# Altium PCB G2G-U Module.PcbDoc
Units mil, origin at the board's own origin, x right, y up, seen from the top; angles counter-clockwise.
Board outline 516 x 504.3 mil, 2 copper layers (Top, Bottom), stack 61.811 mil thick; 5 components, 4 nets, 14 pads, 0 vias.
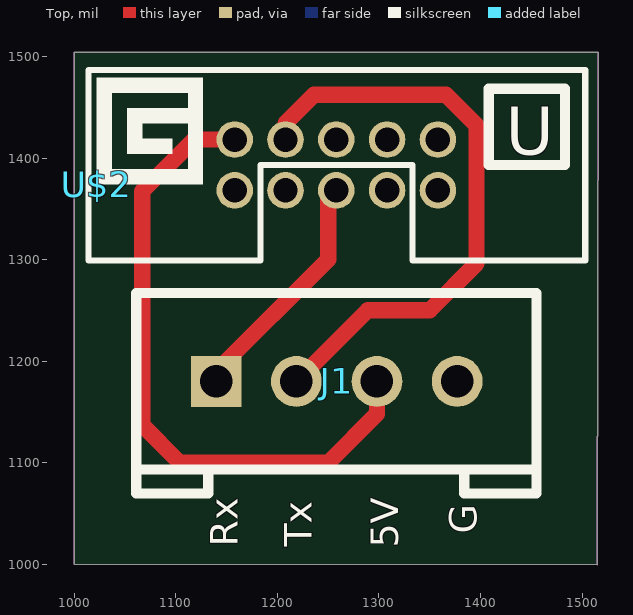
[diagram p0: Top view]
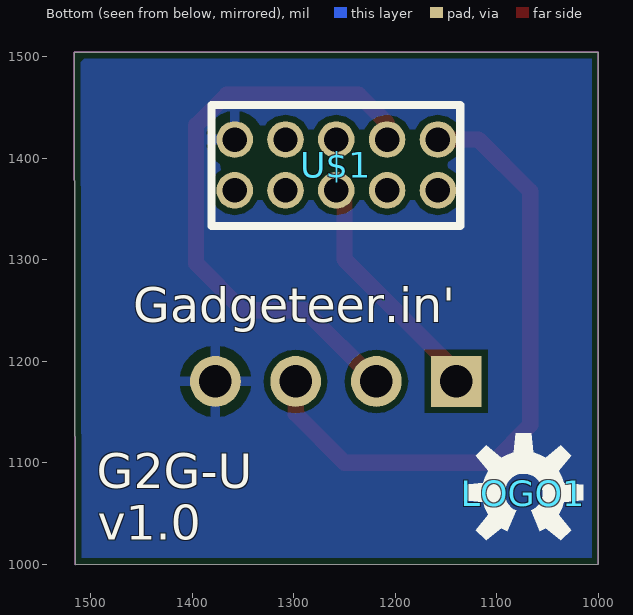
[diagram p1: Bottom view, seen from below]

## Layer stack, top to bottom
Top Solder: solder mask 0.4, Solder Resist, Dk 3.5
Top: signal copper 1.378
Dielectric 1: core 59.0551, FR-4, Dk 4.8
Bottom: signal copper 1.378
Bottom Solder: solder mask 0.4, Solder Resist, Dk 3.5

## Board outline
1000,1000.3 1515,1000 1516,1504.3 1000,1504.3

## Design rules (kind name [scope] priority, off if disabled: settings)
Clearance mdViaVia [IsVia vs IsVia] p1: gap=6
Clearance mdPadVia [IsPad vs IsVia] p2: gap=6
Clearance mdPadPad [IsPad vs IsPad] p3: gap=6
Clearance mdWireVia [(InLayerClass('Signal Layers') AND IsTrack) vs IsVia] p4: gap=6
Clearance mdWirePad [(InLayerClass('Signal Layers') AND IsTrack) vs IsPad] p5: gap=6
Clearance mdWireWire [(InLayerClass('Signal Layers') AND IsTrack) vs (InLayerClass('Signal Layers') AND IsTrack)] p6: gap=6
Clearance [All] p7: gap=6
HoleSize [All] p1: absolutevalues=TRUE maxlimit=100000 minlimit=12 maxpercent=80.000 minpercent=20.000
HoleToHoleClearance [All] p1: gap=8 allowstackedmicrovias=TRUE
PolygonConnect ThermalVias [IsVia] p1: connectstyle=Direct reliefconductorwidth=10 reliefentries=4 polygonreliefangle="90 Angle" airgapwidth=10
PolygonConnect [All] p2: connectstyle=Relief reliefconductorwidth=10 reliefentries=4 polygonreliefangle="90 Angle" airgapwidth=10
RoutingVias [All] p1: holewidth=28 width=50 viastyle="Through Hole" minholewidth=28 minwidth=50 maxholewidth=28 maxwidth=50
SilkToSilkClearance [All] p1 off: silktosilkclearance=10
SilkToSolderMaskClearance [IsPad] p1 off: minsilkscreentomaskgap=10 clearancetoexposedcopper=TRUE
SolderMaskExpansion [All] p1: expansion=2
Width [All] p1: maxlimit=100000 minlimit=6 preferedwidth=10
26 further rules are at their usual default settings.

## Components (designator, comment, footprint, x,y, rotation, side; value= is the part's Value field where it differs from the comment)
FRAME1 "" DUMMY 1000,950.3 r0 top
J1 "" 4P-2.0 1258,1180.3 r0 top
LOGO1 "" OSHW-LOGO-S 1074,1070.3 r180 bottom
U$1 "" 2X5_1.27MM_FEMALE_PLUG 1258,1393.3 r0 bottom
U$2 "" GADGETEER_LOGO_SMALL 1022,1374.3 r0 top

## Footprints (in the part's own frame and the unit in brackets; to place one, negate y for a bottom-side part, rotate by r counter-clockwise, add the part's x,y. Pads: shape width x height; smd on the part's side, far side on the other; paste and mask are expansions set on the pad)
2X5_1.27MM_FEMALE_PLUG [mil] "2X5_1.27MM_FEMALE_PLUG"
  round 36 hole 24: 1(-100,25) 2(-100,-25) 3(-50,25) 4(-50,-25) 5(0,25) 6(0,-25) 7(50,25) 8(50,-25) 9(100,25) 10(100,-25)
  silkscreen extent -122,-59 123,60
4P-2.0 [mil] "4P-2.0"
  rect 50x50 hole 32: 1(-118.11,0)
  round 50 hole 32: 2(-39.37,0) 3(40,0) 4(119,0)
  silkscreen extent -197,-110 197,87
DUMMY [mil] "DUMMY"
GADGETEER_LOGO_SMALL [mil] "GADGETEER_LOGO_SMALL"
  silkscreen extent 0,0 105,105
OSHW-LOGO-S [mil] "OSHW-LOGO-S"
  silkscreen extent -59,-47 59,59

## Part data
FRAME1: library part DUMMY
J1: library part 4P-2.0
LOGO1: library part OSHW-LOGO-S
U$1: library part 2X5_1.27MM_FEMALE_PLUG
U$2: library part GADGETEER_LOGO_SMALL

## Nets (pads, with @x,y where several pads share a name; then routed paths per layer and width w, separated by ;. In a path a pad name is that pad's centre, name@x,y a point inside that pad or via, vN(x,y) a via of type N, cw(c..) or ccw(c..) an arc to the next point about the centre after c; other vN are vias at no path point)
+5V: J1.3 U$1.2 | length 640.3
  Top w16: U$1.2 1118,1418.3 1067,1367.3 1067,1137.3 1104,1100.3 1250,1100.3 1298,1148.3 J1.3
GND: J1.4 U$1.10
RX: J1.1 U$1.5 | length 236.9
  Top w16: J1.1@1140,1180.3 1140,1190.3 1250,1300.3 1250,1360.3 U$1.5
TX: J1.2 U$1.4 | length 589.1
  Top w16: U$1.4 1208,1434.3 1236,1462.3 1366,1462.3 1396,1432.3 1396,1296.3 1350,1250.3 1289,1250.3 J1.2@1219,1180.3
pads on no net: U$1.1 U$1.3 U$1.6 U$1.7 U$1.8 U$1.9

## Polygon pours and split planes (outlines as drawn)
GND on Bottom "Bottom-GND" (solid, remove dead copper, pour order 2): 995,995.3 1516.07,995.3 1520,999.23 1520,1505.37 1516.07,1509.3 995,1509.3

## Keep-outs
Keep-Out Layer:
  the board outline again, w0

## Silkscreen, mask and mechanical layers (free items; w line width, h text height)
Top Overlay:
  lines w10: 1408,1393.3 1408,1468.3 1483,1468.3 1483,1393.3 1408,1393.3
  text "U" at 1425,1403.3 h47.6
  text "G" at 1396,1030.3 h27.2 r90
  text "Rx" at 1161,1017.3 h27.2 r90
  text "Tx" at 1234,1017.3 h27.2 r90
  text "5V" at 1319,1016.3 h27.2 r90
Bottom Overlay:
  text "Gadgeteer.in'" at 1458,1238.3 h34
  text "G2G-U" at 1494,1075.3 h34
  text "v1.0" at 1493,1024.3 h34
Dimension:
  the board outline again, w0

## Text inside footprints (layer, text, board x,y; h text height)
J1: tNames ">NAME" at 1183,1280.3 h29.75; tValues ">VALUE" at 1183,1180.3 h21.25